# Altium PCB DS141-1.1-A循环式二氧化碳.PcbDoc
Units mm, origin at the board's own origin, x right, y up, seen from the top; angles counter-clockwise.
Board outline 42.01 x 116 mm, 2 copper layers (Top Layer, Bottom Layer), stack 1.581 mm thick; 71 components, 63 nets, 260 pads, 80 vias.
Unrouted connection lines stored in the file: 6.
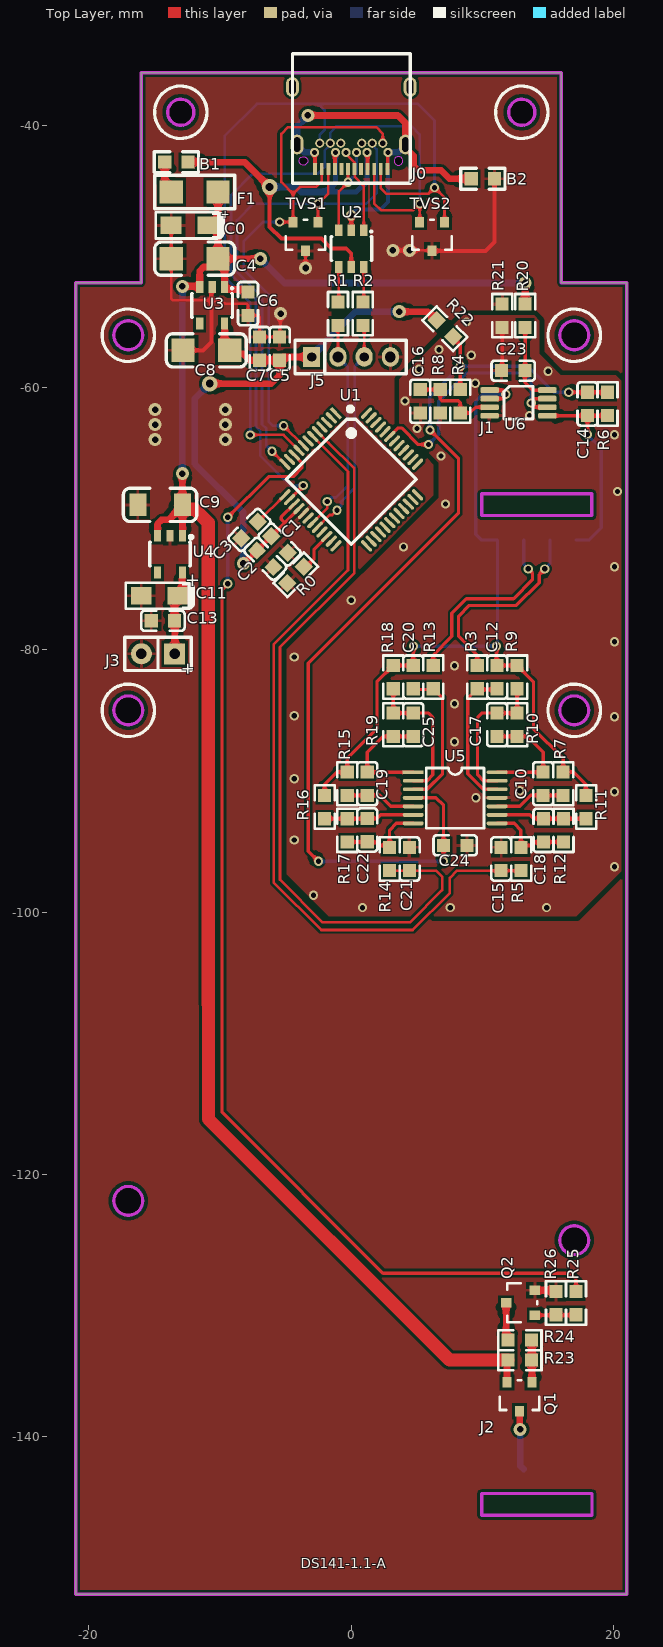
[diagram p0: Top Layer view]
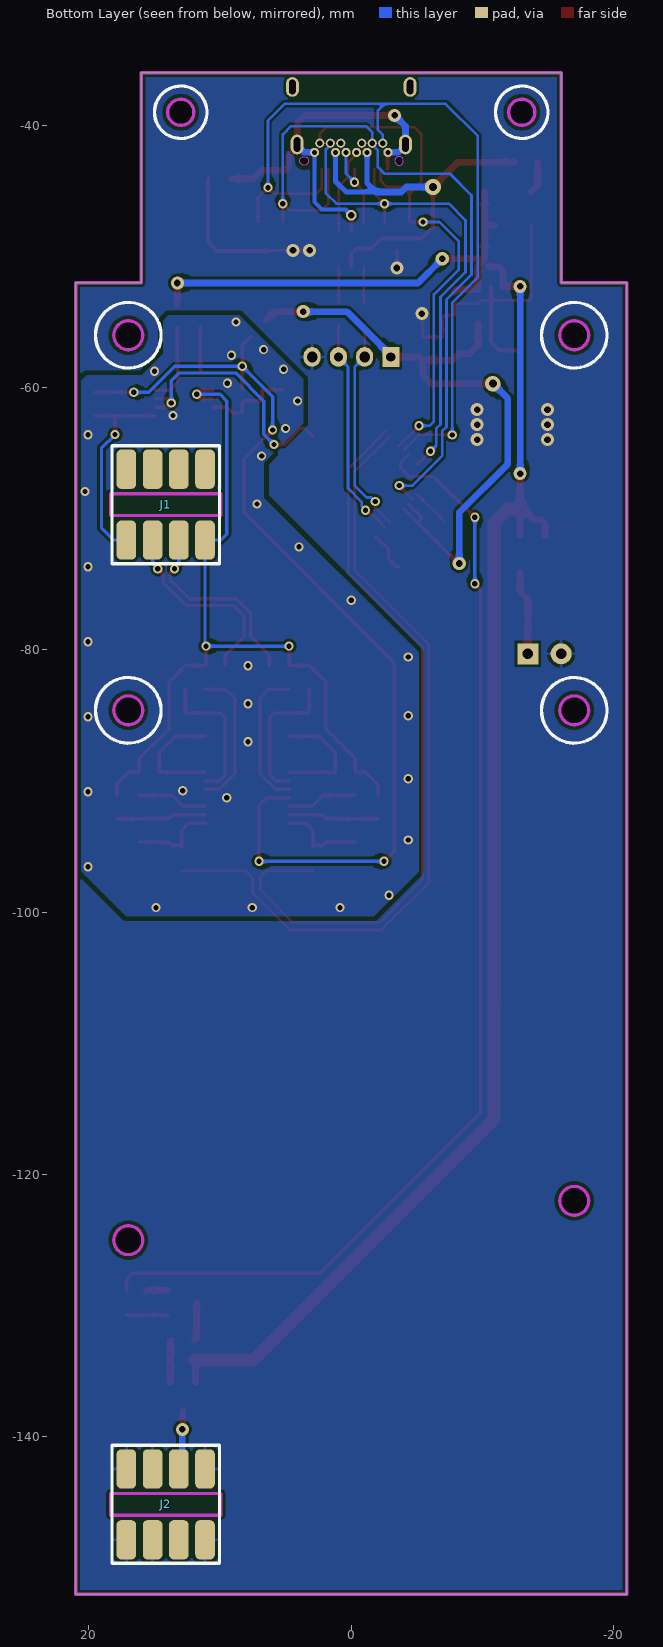
[diagram p1: Bottom Layer view, seen from below]
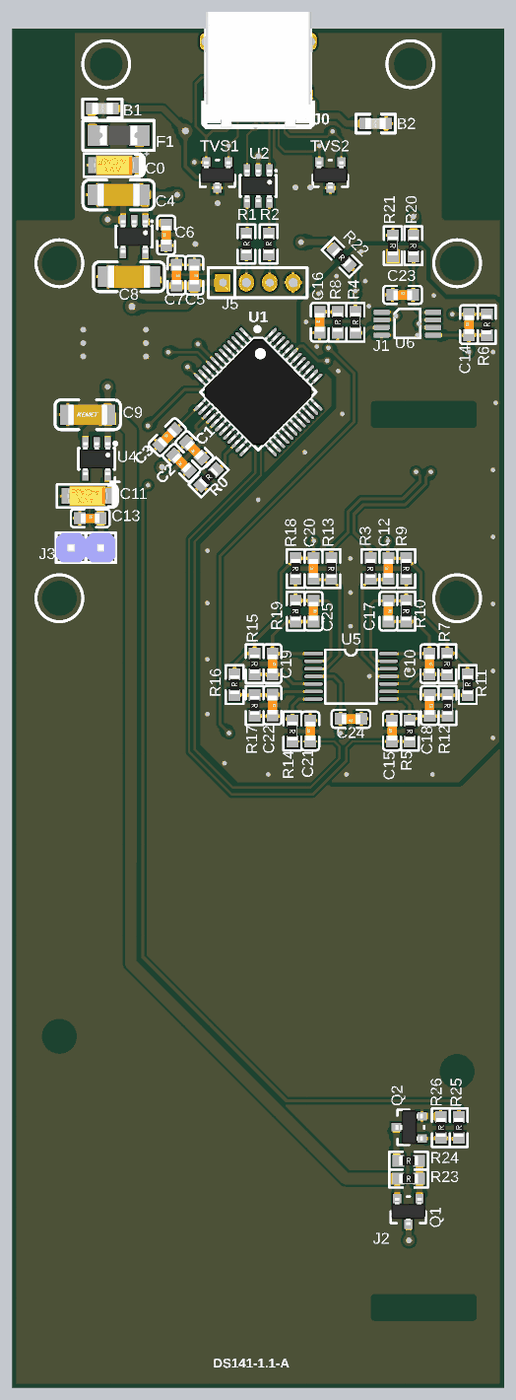
[diagram p2: 3D render of the assembled board from above, using the file's embedded part models]

## Layer stack, top to bottom
Top Solder: solder mask 0.0102, Solder Resist, Dk 3.5
Top Layer: signal copper 0.0356
Dielectric 1: dielectric 1.51, FR-4, Dk 4.8
Bottom Layer: signal copper 0.0356
Bottom Solder: solder mask 0.0102, Solder Resist, Dk 3.5

## Board outline
-21.006,-151.994 -21.006,-51.994 -16.002,-51.994 -16.002,-35.992 16.002,-35.992 16.002,-51.994 20.996,-51.994 20.996,-151.994 21.006,-151.994
cut-out: 15.9,-125 ccw(c17,-125) 17,-126.1 ccw(c17,-125) 18.1,-125 ccw(c17,-125) 17,-123.9 ccw(c17,-125)
cut-out: -18.1,-122 ccw(c-17,-122) -17,-123.1 ccw(c-17,-122) -15.9,-122 ccw(c-17,-122) -17,-120.9 ccw(c-17,-122)
cut-out: 15.9,-84.6 ccw(c17,-84.6) 17,-85.7 ccw(c17,-84.6) 18.1,-84.6 ccw(c17,-84.6) 17,-83.5 ccw(c17,-84.6)
cut-out: 12,-39 ccw(c13,-39) 13,-40 ccw(c13,-39) 14,-39 ccw(c13,-39) 13,-38 ccw(c13,-39)
cut-out: -13,-40 ccw(c-13,-39) -12,-39 ccw(c-13,-39) -13,-38 ccw(c-13,-39) -14,-39 ccw(c-13,-39)
cut-out: -18.1,-84.6 ccw(c-17,-84.6) -17,-85.7 ccw(c-17,-84.6) -15.9,-84.6 ccw(c-17,-84.6) -17,-83.5 ccw(c-17,-84.6)
cut-out: 18.1,-56 ccw(c17,-56) 17,-54.9 ccw(c17,-56) 15.9,-56 ccw(c17,-56) 17,-57.1 ccw(c17,-56)
cut-out: -18.1,-56 cw(c-17,-56) -17,-54.9 cw(c-17,-56) -15.9,-56 cw(c-17,-56) -17,-57.1 cw(c-17,-56)

## Design rules (kind name [scope] priority, off if disabled: settings)
Clearance [All] p1: gap=0.2 ignorepadtopadclearanceinfootprint=TRUE except(0.381: Fill-Fill Fill-Poly Fill-Region Poly-Poly Poly-Region Region-Region)
MinimumSolderMaskSliver [All] p1: minsoldermaskwidth=0.102
PolygonConnect GND [All] p1: thpad.connectstyle=Relief thpad.reliefconductorwidth=0.254 thpad.reliefentries=4 thpad.polygonreliefangle="90 Angle" thpad.airgapwidth=0.254 smdpad.connectstyle=Relief smdpad.reliefconductorwidth=0.254 smdpad.reliefentries=4 smdpad.polygonreliefangle="90 Angle" smdpad.airgapwidth=0.254 via.connectstyle=Direct via.reliefconductorwidth=0.254 via.reliefentries=4 via.polygonreliefangle="90 Angle" via.airgapwidth=0.254
PolygonConnect VSS [InNet('VSS') vs InNet('VSS')] p2: thpad.connectstyle=Relief thpad.reliefconductorwidth=0.508 thpad.reliefentries=4 thpad.polygonreliefangle="90 Angle" thpad.airgapwidth=0.254 smdpad.connectstyle=Relief smdpad.reliefconductorwidth=0.508 smdpad.reliefentries=4 smdpad.polygonreliefangle="90 Angle" smdpad.airgapwidth=0.254 via.connectstyle=Direct via.reliefconductorwidth=0.508 via.reliefentries=4 via.polygonreliefangle="90 Angle" via.airgapwidth=0.254
RoutingVias [All] p1: holewidth=0.6 width=1 viastyle="Through Hole" minholewidth=0.4 minwidth=0.8 maxholewidth=1 maxwidth=2
SilkToSilkClearance [All] p1: silktosilkclearance=0.025
SilkToSolderMaskClearance [IsPad] p1: minsilkscreentomaskgap=0.025 clearancetoexposedcopper=TRUE
SolderMaskExpansion [All] p1: expansion=0.102 istentingtop=FALSE
Width [All] p1: maxlimit=1 minlimit=0.2 preferedwidth=0.2
27 further rules are at their usual default settings.

## Components (designator, comment, footprint, x,y, rotation, side; value= is the part's Value field where it differs from the comment)
B1 "CBM160808U102" 0603Bead -13.335,-42.799 r180 top
B2 "CBM160808U102" 0603Bead 10.033,-44.069 r0 top
C0 "AVX_10uF/16V ±10％(C106)" AVX_3216-18(1206)_SMD -12.319,-47.625 r180 top value=10uF
C1 "SMDCAP00013" 0603CAP -5.467,-71.953 r135 top value=100nF
C2 "SMDCAP00012" 0603CAP -6.559,-73.045 r135 top value=4.7uF
C3 "SMDCAP00015" 0603CAP -7.764,-70.846 r45 top value=1uF
C4 "MLCC 10uF 50V ±20％ 1206" 1206CAP#1 -11.938,-50.165 r0 top value=10uF
C5 "SMDCAP00013" 0603CAP -5.461,-57.022 r270 top value=100nF
C6 "SMDCAP00015" 0603CAP -7.874,-53.593 r90 top value=1uF
C7 "SMDCAP00015" 0603CAP -6.985,-57.022 r270 top value=1uF
C8 "MLCC 10uF 50V ±20％ 1206" 1206CAP#1 -11.049,-57.149 r0 top value=10uF
C9 "MLCC 10uF 50V ±20％ 1206" 1206CAP#2 -14.578,-68.934 r0 top value=10uF
C10 "SMDCAP00015" 0603CAP 14.63,-90.195 r270 top value=1uF
C11 "AVX_10uF/16V ±10％(C106)" AVX_3216-18(1206)_SMD -14.603,-75.868 r180 top value=10uF
C12 "SMDCAP00013" 0603CAP 11.125,-82.066 r90 top value=100nF
C13 "SMDCAP00015" 0603CAP -14.362,-77.773 r0 top value=1uF
C14 "SMDCAP00013" 0603CAP 18.009,-61.239 r90 top value=100nF
C15 "SMDCAP00013" 0603CAP 11.43,-95.936 r90 top value=100nF
C16 "SMDCAP00013" 0603CAP 5.258,-61.036 r90 top value=100nF
C17 "SMDCAP00013" 0603CAP 11.125,-85.699 r270 top value=100nF
C18 "SMDCAP00013" 0603CAP 14.656,-93.751 r270 top value=100nF
C19 "SMDCAP00015" 0603CAP 1.219,-90.195 r270 top value=1uF
C20 "SMDCAP00013" 0603CAP 4.724,-82.066 r90 top value=100nF
C21 "SMDCAP00013" 0603CAP 4.445,-95.936 r90 top value=100nF
C22 "SMDCAP00013" 0603CAP 1.219,-93.726 r270 top value=100nF
C23 "SMDCAP00013" 0603CAP 12.344,-58.699 r0 top value=100nF
C24 "SMDCAP00013" 0603CAP 7.925,-94.894 r180 top value=100nF
C25 "SMDCAP00013" 0603CAP 4.724,-85.699 r270 top value=100nF
F1 "SMD1206-050C-16V" 1206FUSE -11.938,-45.085 r0 top value="16V /0.5A"
J0 "USB_Type_C_24P" USB_TYPE_C_24P_Receptacle 0,-40.2 r180 top locked
J1 "SL000000034" CO2_connecet_4p 14.148,-68.918 r180 top value=GZG361
J2 "SL000000029" CO2_connecet_4p 14.148,-145.143 r0 top value=红外线灯泡
J3 "SL000000042" SIP2 -14.732,-80.289 r180 top value=Motor
J5 "DIP4单排直针  间距2mm 针长11mm 铜" H4 -3.016,-57.658 r0 top value=4P
Q1 "SMDPMOS00001" SOT23 12.828,-136.949 r180 top value=IRLML6402TRPBF
Q2 "SMDNPN00001" SOT23 12.904,-129.769 r90 top value=SS8050
R0 "Chip 0R 1/16W ±1％ 0603" 0603RES -4.242,-74.27 r45 top value=0R
R1 "Chip 22R 1/16W ±1％ 0603" 0603RES -1.016,-54.356 r90 top value=22R
R2 "Chip 22R 1/16W ±1％ 0603" 0603RES 0.889,-54.356 r90 top value=22R
R3 "SMDRES00047" 0603RES 9.601,-82.066 r270 top value=4.7K
R4 "SMDRES00071" 0603RES 8.306,-61.036 r90 top value=100K
R5 "SMDRES00015" 0603RES 12.954,-95.936 r270 top value=100R
R6 "Chip 500K 1/10W ±1% 0603" 0603RES 19.533,-61.239 r90 top value=500K
R7 "SMDRES00085" 0603RES 16.154,-90.195 r270 top value=1M
R8 "SMDRES00071" 0603RES 6.782,-61.036 r90 top value=100K
R9 "Chip 5K 1/10W ±0.1％ 0603" 0603RES 12.649,-82.066 r270 top value="5K ±0.1%"
R10 "Chip 500K 1/10W ±0.1% 0603" 0603RES 12.649,-85.699 r270 top value="500K ±0.1%"
R11 "Chip 2K 1/10W ±0.1％ 0603" 0603RES 17.907,-91.973 r90 top value="2K ±0.1%"
R12 "Chip 50K 1/10W ±0.1％ 0603" 0603RES 16.18,-93.751 r270 top value="50K ±0.1%"
R13 "SMDRES00047" 0603RES 6.248,-82.066 r270 top value=4.7K
R14 "SMDRES00015" 0603RES 2.921,-95.936 r270 top value=100R
R15 "SMDRES00085" 0603RES -0.305,-90.195 r270 top value=1M
R16 "Chip 2K 1/10W ±0.1％ 0603" 0603RES -2.032,-91.973 r90 top value="2K ±0.1%"
R17 "Chip 50K 1/10W ±0.1％ 0603" 0603RES -0.305,-93.751 r270 top value="50K ±0.1%"
R18 "Chip 5K 1/10W ±0.1％ 0603" 0603RES 3.2,-82.066 r270 top value="5K ±0.1%"
R19 "Chip 500K 1/10W ±0.1% 0603" 0603RES 3.2,-85.699 r270 top value="500K ±0.1%"
R20 "Chip 0R 1/16W ±1％ 0603" 0603RES 13.259,-54.508 r270 top value=0R
R21 "Chip 0R 1/16W ±1％ 0603" 0603RES 11.506,-54.508 r270 top value=0R
R22 "Chip 0R 1/16W ±1％ 0603" 0603RES 7.137,-55.499 r315 top value=0R
R23 "SMDRES00056" 0603RES 12.853,-134.147 r0 top value=10K
R24 "SMDRES00034" 0603RES 12.853,-132.623 r0 top value=1K
R25 "SMDRES00090" 0603RES 17.136,-129.794 r90 top value=3.3K
R26 "SMDRES00071" 0603RES 15.612,-129.794 r90 top value=100K
TVS1 "MMBZ9V1A" SOT23 -3.49,-48.471 r180 top
TVS2 "MMBZ9V1A" SOT23 6.157,-48.471 r180 top
U1 "STC32G12K128_35I LQFP48" LQFP-48 0,-67 r315 top locked value=STC32G12K128
U2 "82400102" SOT23-6 0,-49.4 r180 top
U3 "ME6211C33M5G-N" SOT23-5 -10.607,-53.717 r180 top
U4 "ME6211C33M5G-N" SOT23-5 -13.816,-72.693 r180 top
U5 "TP5594-TR  TSSOP-14" TSSOP14 7.925,-91.694 r0 top value=TP5594
U6 "LMV358IDGKR  VSSOP-8" VSSOP-8-H-1.1 12.751,-61.163 r0 top value=LMV358

## Footprints (in the part's own frame and the unit in brackets; to place one, negate y for a bottom-side part, rotate by r counter-clockwise, add the part's x,y. Pads: shape width x height; smd on the part's side, far side on the other; paste and mask are expansions set on the pad)
0603Bead [mm]
  rect 1x1 smd: 1(-0.889,0) 2(0.889,0)
  silkscreen extent -1.69,-0.8 1.69,0.8, body extent -0.9,-0.48 0.85,0.48, height 0.95
0603CAP [mm]
  rect 1x1 smd: 1(-0.889,0) 2(0.89,0)
  silkscreen extent -1.65,-0.76 1.65,0.76, body extent -0.8,-0.4 0.8,0.4, height 0.3
0603RES [mm]
  rect 1x1 smd: 1(-0.889,0) 2(0.889,0)
  silkscreen extent -1.65,-0.76 1.65,0.76, body extent -0.8,-0.41 0.8,0.41, height 0.51
1206CAP#1 [mil]
  rect 70x70 smd: 1(-70,0) 2(70,0)
  silkscreen extent -120,-50 120,50, body extent -73,-38 73,38, height 47
1206CAP#2 [mil]
  rect 51.18x66.93 smd: 1(-66.93,0) 2(66.93,0)
  silkscreen extent -110,-50 110,50, body extent -67,-35 67,35, height 71
1206FUSE [mil]
  rect 70x70 smd: 1(-70,0) 2(70,0)
  silkscreen extent -120,-50 120,50, body extent -63,-33 63,33, height 57
AVX_3216-18(1206)_SMD [mm]
  rect 1.6x1.35 smd: 1(-1.41,0) 2(1.41,0)
  silkscreen extent -2.6,-1 2.6,1, body extent -1.7,-0.84 1.7,0.84, height 1.71
CO2_connecet_4p [mm]
  rrect50% 1.5x3 smd far side: 1(-3,2.7) 1(-3,-2.7) 2(-1,2.7) 2(-1,-2.7) 3(1,2.7) 3(1,-2.7) 4(3,2.7) 4(3,-2.7)
  Keep-Out Layer lines w0.254: 4.2,0.825 -4.2,0.825 -4.2,-0.825 4.2,-0.825 4.2,0.825
H4 [mm]
  rect 1.3x1.5 hole 0.7: 1(0,0)
  oval 1.3x1.5 hole 0.813: 2(2,0) 4(6,0)
  oval 1.3x1.5 hole 0.7: 3(4,0)
  silkscreen extent -1.27,-1.27 7.2,1.27
LQFP-48 [mm]
  rect 1.1x0.27 smd mask+0.08: 1(-4.4,2.75)
  oval 1.1x0.27 smd mask+0.08: 2(-4.4,2.25) 3(-4.4,1.75) 4(-4.4,1.25) 5(-4.4,0.75) 6(-4.4,0.25) 7(-4.4,-0.25) 8(-4.4,-0.75) 9(-4.4,-1.25) 10(-4.4,-1.75) 11(-4.4,-2.25) 12(-4.4,-2.75) 25(4.4,-2.75) 26(4.4,-2.25) 27(4.4,-1.75) 28(4.4,-1.25) 29(4.4,-0.75) 30(4.4,-0.25) 31(4.4,0.25) 32(4.4,0.75) 33(4.4,1.25) 34(4.4,1.75) 35(4.4,2.25) 36(4.4,2.75)
  oval 0.27x1.1 smd mask+0.08: 13(-2.75,-4.4) 14(-2.25,-4.4) 15(-1.75,-4.4) 16(-1.25,-4.4) 17(-0.75,-4.4) 18(-0.25,-4.4) 19(0.25,-4.4) 20(0.75,-4.4) 21(1.25,-4.4) 22(1.75,-4.4) 23(2.25,-4.4) 24(2.75,-4.4) 37(2.75,4.4) 38(2.25,4.4) 39(1.75,4.4) 40(1.25,4.4) 41(0.75,4.4) 42(0.25,4.4) 43(-0.25,4.4) 44(-0.75,4.4) 45(-1.25,4.4) 46(-1.75,4.4) 47(-2.25,4.4) 48(-2.75,4.4)
  silkscreen extent -3.95,-3.5 3.5,3.85, body extent -4.51,-4.5 4.5,4.5, height 1.54
SIP2 [mm]
  rect 1.6x1.6 hole 0.813: 1(-1.27,0)
  round 1.6 hole 0.813: 2(1.27,0)
  silkscreen extent -2.54,-1.27 2.54,1.27, body extent -2.54,-1.27 2.54,1.27, height 8.64
SOT23 [mm]
  rect 0.7x0.8 smd: 1(-0.95,-1.1) 2(0.95,-1.1) 3(0,1.1)
  silkscreen extent -1.5,-1.27 1.5,1, body extent -1.46,-1.17 1.46,1.17, height 1
SOT23-5 [mm] "SOT-23/SC-74A; 5 Leads; Body 3.1 x 3 mm, inc. leads (LxW max)"
  rect 0.55x0.9 smd: 1(-0.95,-1.4) 2(0,-1.4) 3(0.95,-1.4) 4(0.95,1.4) 5(-0.95,1.4)
  silkscreen extent -1.59,-1.36 1.55,0.9, body extent -1.45,-1.4 1.45,1.4, height 1.45
SOT23-6 [mm] "SOT-23/SC-74A; 5 Leads; Body 3.1 x 3 mm, inc. leads (LxW max)"
  rect 0.55x0.9 smd: 1(-0.95,-1.4) 2(0,-1.4) 3(0.95,-1.4) 4(0.95,1.4) 5(0,1.4) 6(-0.95,1.4)
  silkscreen extent -1.59,-1.36 1.55,0.9, body extent -1.45,-1.4 1.45,1.4, height 1.45
TSSOP14 [mm]
  rect 1.6x0.3 smd: 1(-3.2,2.375)
  oval 1.6x0.3 smd: 2(-3.2,1.725) 3(-3.2,1.075) 4(-3.2,0.425) 5(-3.2,-0.225) 6(-3.2,-0.875) 7(-3.2,-1.525) 8(3.2,-1.525) 9(3.2,-0.875) 10(3.2,-0.225) 11(3.2,0.425) 12(3.2,1.075) 13(3.2,1.725) 14(3.2,2.375)
  silkscreen extent -2.2,-1.9 2.2,2.7
USB_TYPE_C_24P_Receptacle [mm]
  oval 1x1.5 hole 0.5 slot 1.1 at 90.5 deg: 0(-4.49,-3.13) 0(-4.13,1.26) 0(4.13,1.26) 0(4.49,-3.13)
  rect 0.3x0.9 smd mask+0.1: A1(-2.75,3.13) A2(-2.25,3.13) A3(-1.75,3.13) A4(-1.25,3.13) A5(-0.75,3.13) A6(-0.25,3.13) A7(0.25,3.13) A8(0.75,3.13) A9(1.25,3.13) A10(1.75,3.13) A11(2.25,3.13) A12(2.75,3.13)
  round 0.7 hole 0.4: B1(2.8,1.86) B2(2.4,1.16) B3(1.6,1.16) B4(1.2,1.86) B5(0.8,1.16) B6(0.4,1.86) B7(-0.4,1.86) B8(-0.8,1.16) B9(-1.2,1.86) B10(-1.6,1.16) B11(-2.4,1.16) B12(-2.8,1.86)
  Keep-Out Layer board cut-out: 3.98,2.51 3.955,2.384 3.883,2.277 3.776,2.205 3.65,2.18 3.65,2.18 3.524,2.205 3.417,2.277 3.345,2.384 3.32,2.51 3.32,2.51 3.345,2.636 3.417,2.743 3.524,2.815 3.65,2.84 3.65,2.84 3.776,2.815 3.883,2.743 3.955,2.636 3.98,2.51
  Keep-Out Layer board cut-out: -3.93,2.51 -3.905,2.384 -3.833,2.277 -3.726,2.205 -3.6,2.18 -3.6,2.18 -3.474,2.205 -3.367,2.277 -3.295,2.384 -3.27,2.51 -3.27,2.51 -3.295,2.636 -3.367,2.743 -3.474,2.815 -3.6,2.84 -3.6,2.84 -3.726,2.815 -3.833,2.743 -3.905,2.636 -3.93,2.51
  silkscreen extent -4.48,-5.66 4.48,4.21, body extent -4.87,-5.66 4.88,4.21, height 3.36
VSSOP-8-H-1.1 [mm]
  rrect50% 1.4x0.45 smd mask+0.05: 1(-2.2,0.975) 2(-2.2,0.325) 3(-2.2,-0.325) 4(-2.2,-0.975) 5(2.2,-0.975) 6(2.2,-0.325) 7(2.2,0.325) 8(2.2,0.975)
  silkscreen extent -1.1,-1.22 1.1,1.28

## Part data
B1 B2: library part "Chip Ferrite Bead 0606", "贴片磁珠"
C0 C11: "钽电容"
C1 C5 C12 C14 C15 C16 C17 C18 C20 C21 C22 C23 C24 C25: library part "MLCC 100nF 50V ±10％ 0603", "贴片电容"
C2: library part "MLCC 4.7uF 50V ±10％ 0603", "贴片电容"
C3 C6 C7 C10 C13 C19: library part "MLCC 1uF 50V ±10％ 0603", "贴片电容"
C4 C8 C9: "贴片电容"
F1: "贴片自恢复保险丝 16V /0.5A"
J1: library part "XH2.54mm-4AW 弯针座", "4P弯针座"
J2: library part "XH2.54mm-4A 直针座", "4P直针座"
J3: library part "DIP2 单排直针 1*40P 间距2.54mm 针长11mm 铜", "单排直针"
J5: "单排直针"
Q1: library part "IRLML6402TRPBF SOT-23 IR", "贴片P-MOS管"
Q2: library part "SS8050 Y1 SOT-23", "贴片三极管"
R0 R1 R2 R20 R21 R22: "贴片电阻"
R3 R13: library part "Chip 4.7K 1/10W ±1％ 0603", "贴片电阻"
R4 R8 R26: library part "Chip 100K 1/16W ±1％ 0603", "贴片电阻"
R5 R14: library part "Chip 100R 1/16W ±1％ 0603", "贴片电阻"
R7 R15: library part "Chip 1M 1/16W ±1％ 0603", "贴片电阻"
R23: library part "Chip 10K 1/16W ±1％ 0603", "贴片电阻"
R24: library part "Chip 1K 1/16W ±1％ 0603", "贴片电阻"
R25: library part "Chip 3.3K 1/16W ±1％ 0603", "贴片电阻"
TVS1 TVS2: library part TVS, "瞬态抑制二极管"
U1: "单片机芯片"
U2: "瞬态抑制二极管(TVS)"
U3 U4: "稳压芯片"
U6: "双路、5.5V、1MHz、4mV 失调电压、RRO 运算放大器"

## Via types
v1: diameter 0.7, hole 0.4, Top Layer to Bottom Layer, tented both sides, 59 vias
v2: diameter 1, hole 0.5, Top Layer to Bottom Layer, tented both sides, 18 vias
v3: diameter 1.2, hole 0.6, Top Layer to Bottom Layer, tented both sides, 2 vias
v4: diameter 0.8, hole 0.5, Top Layer to Bottom Layer, tented both sides, 1 vias

## Nets (pads, with @x,y where several pads share a name; then routed paths per layer and width w, separated by ;. In a path a pad name is that pad's centre, name@x,y a point inside that pad or via, vN(x,y) a via of type N, cw(c..) or ccw(c..) an arc to the next point about the centre after c; other vN are vias at no path point)
+: 
-: 
ADC0: C21.1 R14.2 U1.5 | length 57.6
  Top Layer w0.2: U1.5 -1.736,-64.204 0.229,-66.167 0.229,-74.117 -5.436,-79.781 -5.436,-97.511 -2.184,-100.762 4.48,-100.762 6.934,-98.308 6.934,-97.282 6.477,-96.825 C21.1 R14.2
ADC1: C15.1 R5.2 U1.6 | length 60.3
  Top Layer w0.2: U1.6 -0.254,-66.392 -0.254,-73.917 -5.918,-79.582 -5.918,-97.711 -2.283,-101.346 4.683,-101.346 7.518,-98.511 7.518,-97.384 8.077,-96.825 C15.1 R5.2@12.929,-96.825
ADC8: U1.43 U6.6 U6.7 | length 20.2
  Top Layer w0.254: U1.43 3.578,-63.068 3.835,-63.068 5.099,-64.332 v1(5.883,-64.332) ; U6.6 13.87,-61.488 13.721,-61.339 v1(13.721,-61.173) 13.721,-61.006 13.889,-60.838 U6.7
  Bottom Layer w0.254: v1(5.883,-64.332) 6.671,-63.544 6.671,-61.02 8.814,-58.877 13.132,-58.877 13.721,-59.466 v1(13.721,-61.173)
AGND: C15.2 C16.1 C21.2 C23.1 C24.1 R8.1 R21.2 U5.11 U6.4 | length 3.3
  Top Layer w0.254: C23.1 11.506,-58.649 R21.2
  other v1: 0.851,-99.644 7.544,-99.644 14.897,-99.644 -2.871,-98.694 20.066,-96.52 -4.343,-94.488 9.5,-91.262 20.066,-90.802 12.852,-90.729 -4.343,-89.814 7.874,-86.995 20.066,-85.084 -4.343,-85.014 7.874,-84.099 7.874,-81.204 -4.343,-80.543 20.066,-79.366 0,-76.2 20.066,-73.648 3.988,-72.136 7.188,-68.859 20.295,-67.92 6.833,-65.202 20.066,-63.586 5.004,-63.119 13.589,-62.128 4.089,-61.011 9.449,-59.665 15.011,-58.75 5.156,-58.598 9.144,-57.531 6.68,-57.099 8.788,-54.991
D+_I/O1: J0.A6 J0.B6 U2.1 | length 6.5
  Top Layer w0.2: J0.B6 -0.4,-42.179 0.25,-42.829 J0.A6 0.266,-43.346 0.266,-43.93 0.95,-44.613 U2.1
D-_I/O2: J0.A7 J0.B7 U2.3 | length 7
  Top Layer w0.2: -0.95,-47.498 -0.95,-45.032 v1(-0.25,-44.332) J0.A7
  Bottom Layer w0.2: v1(-0.25,-44.332) 0.4,-43.682 J0.B7
DAC_OUT: R25.2 U1.10 | length 87.2
  Top Layer w0.254: v1(-9.423,-74.955) -9.855,-75.387 -9.855,-115.24 2.413,-127.508 16.662,-127.508 17.136,-127.982 R25.2 R25.2@17.171,-128.87 ; v1@-9.411,-69.888 -6.299,-66.777 -4.42,-66.777 -3.759,-66.116 -3.759,-65.716 U1.10
  Bottom Layer w0.254: v1(-9.423,-74.955) v1(-9.423,-69.875)
Dis1_red_EN: U1.35
Dis2_green_EN: U1.34
Dis3_blue_EN: U1.36
GND: B2.2 C0.2 C1.1 C2.1 C3.1 C4.1 C5.1 C6.1 C7.1 C8.1 C9.1 C11.2 C13.1 J2.1 J2.3 J2.4 J3.2 J5.4 Q2.2 R0.1 R21.1 R26.2 TVS1.3 TVS2.3 U1.17 U3.2 U4.2 | length 40.5
  Top Layer w0.2: C0.2 -13.729,-50.152 C4.1 -13.716,-53.223 -13.599,-53.34 -10.668,-53.34 -9.906,-53.34 -9.711,-53.535 ccw(c-9.569,-53.394) -9.569,-53.594 -8.074,-53.594 cw(c-8.074,-53.794) -7.874,-53.794 C6.1 -7.185,-54.482 cw(c-7.185,-54.682) -6.985,-54.682 C7.1 C5.1 -5.444,-55.733 cw(c-5.244,-55.733) -5.444,-55.726 v2(-5.385,-54.356) ; TVS1.3 -3.49,-50.866 v2(-3.48,-50.876) ; v2(3.175,-49.53) v2(4.445,-49.53) 6.116,-49.53 TVS2.3
  Top Layer w0.3: C8.1@-12.7,-57.15 -11.303,-57.15 -10.668,-56.515 -10.668,-53.34 U3.2@-10.668,-52.317 ; TVS2.3 10.246,-49.571 10.922,-48.895 B2.2 B2.2@10.905,-44.052
  Top Layer w0.508: Q2.2 15.526,-128.819 R26.2
  other v2: -14.961,-63.957 -9.6,-63.957 -14.961,-62.814 -9.6,-62.814 -14.961,-61.671 -9.6,-61.671
I2C1_SCL: U1.38
I2C1_SDA: U1.37
KEY_HOME: U1.21
NetB1_2: B1.2 F1.1 | length 2.5
  Top Layer w0.508: B1.2 -14.224,-44.577 F1.1
NetC10_1: C10.1 C17.2 R10.2 U5.14 | length 9
  Top Layer w0.254: U5.14 14.618,-89.319 C10.1 14.63,-87.808 13.41,-86.588 11.126,-86.588 C17.2
NetC10_2: C10.2 R7.2 U5.10 | length 5.4
  Top Layer w0.254: U5.10 12.856,-91.919 13.69,-91.085 C10.2 14.631,-91.084 R7.2
NetC12_1: C12.1 R3.2 U5.12 | length 11.1
  Top Layer w0.254: U5.12 10.076,-90.619 8.89,-89.433 8.89,-83.667 R3.2 9.653,-83.007 11.049,-83.007 11.101,-82.955 C12.1
NetC16_2: C16.2 R4.1 R8.2 U6.3 | length 7.1
  Top Layer w0.254: C16.2 R8.2 R8.2 6.782,-60.858 6.909,-60.985 8.153,-60.985 8.306,-61.138 R4.1 9.042,-61.925 9.479,-61.488 U6.3
NetC17_1: C17.1 R9.2 R10.1 U5.13 | length 11.1
  Top Layer w0.254: U5.13 10.068,-89.969 9.627,-89.528 9.627,-85.141 9.958,-84.81 C17.1 R10.1 R9.2
NetC18_1: C18.1 R11.1 R12.1 U5.9 | length 6.9
  Top Layer w0.254: U5.9 13.6,-92.569 13.868,-92.837 14.63,-92.837 C18.1 16.154,-92.862 R11.1@17.882,-92.862
NetC18_2: C18.2 R5.1 R12.2 U5.8 | length 6.7
  Top Layer w0.254: U5.8 12.422,-93.219 12.929,-93.726 12.929,-95.047 13.077,-94.899 13.661,-94.899 13.898,-94.661 14.585,-94.661 14.63,-94.616 14.655,-94.64 R12.2@16.154,-94.64
NetC19_1: C19.1 C25.2 R19.2 U5.1 | length 9
  Top Layer w0.254: U5.1 1.232,-89.319 C19.1 1.219,-87.808 2.439,-86.588 C25.2 C25.2
NetC19_2: C19.2 R15.2 U5.5 | length 5.4
  Top Layer w0.254: R15.2 1.218,-91.084 C19.2 2.16,-91.085 2.994,-91.919 U5.5
NetC20_1: C20.1 R13.2 U5.3 | length 11.1
  Top Layer w0.254: U5.3 5.774,-90.619 6.96,-89.433 6.96,-83.667 R13.2 6.197,-83.007 4.801,-83.007 4.749,-82.955 C20.1
NetC22_1: C22.1 R16.1 R17.1 U5.6 | length 6.9
  Top Layer w0.254: R16.1 R17.1 1.194,-92.862 C22.1 1.981,-92.837 2.249,-92.569 U5.6
NetC22_2: C22.2 R14.1 R17.2 U5.7 | length 6.7
  Top Layer w0.254: R17.2 1.195,-94.64 C22.2 1.265,-94.661 1.951,-94.661 2.189,-94.899 2.773,-94.899 R14.1 2.921,-93.726 3.428,-93.219 U5.7
NetC25_1: C25.1 R18.2 R19.1 U5.2 | length 11.1
  Top Layer w0.254: R18.2 R19.1 C25.1 5.892,-84.81 6.223,-85.141 6.223,-89.528 5.782,-89.969 U5.2
NetJ2_2: J2.2 Q1.3 | length 4.5
  Top Layer w0.508: Q1.3 12.853,-138.074 12.853,-139.396 v2(12.878,-139.421)
  Bottom Layer w0.508: v2(12.878,-139.421) 12.878,-142.173 J2.2@13.148,-142.443
NetQ1_1: Q1.1 R23.2 R24.2 | length 3.2
  Top Layer w0.508: R24.2 13.778,-132.659 Q1.1
NetQ2_1: Q2.1 R25.1 R26.1 | length 3.1
  Top Layer w0.254: Q2.1 17.1,-130.719 R25.1
NetQ2_3: Q2.3 R24.1 | length 2.9
  Top Layer w0.508: Q2.3 11.804,-132.463 R24.1
NTC: C14.1 J1.1 R6.1 U6.5 | length 15.8
  Top Layer w0.254: U6.5 C14.1@18.009,-62.138 ; v1(18.009,-63.576) C14.1@18.009,-62.138 ; C14.1 C14.1@18.009,-62.138 ; R6.1 19.523,-62.138 C14.1@18.009,-62.138
  Bottom Layer w0.254: J1.1@17.148,-71.618 18.095,-71.618 19.05,-70.663 19.05,-64.618 v1(18.009,-63.576)
P3.0/D-/RxD: J5.2 R1.1 U1.19 | length 16.7
  Top Layer w0.2: U1.19 -1.829,-69.182 v1(-1.829,-68.682) ; J5.2 R1.1
  Bottom Layer w0.2: v1(-1.829,-68.682) -1.524,-68.377 -1.168,-68.377 -0.279,-67.488 -0.279,-58.395 J5.2
P3.1/D+/TxD: J5.3 R2.1 U1.20 | length 17
  Top Layer w0.2: U1.20 -1.644,-69.705 -1.455,-69.705 v1(-1.092,-69.342) ; R2.1 0.984,-55.34 J5.3
  Bottom Layer w0.2: v1(-1.092,-69.342) -0.787,-69.037 -0.787,-68.707 0.254,-67.666 0.254,-58.388 J5.3
P3.3: R0.2 U1.22 | length 3.1
  Top Layer w0.254: R0.2 -3.435,-73.641 -2.84,-73.046 -2.84,-72.315 U1.22
PWM: U1.33
REF: J1.3 R13.1 | length 15.1
  Top Layer w0.254: R13.1 6.248,-80.391 7.671,-78.969 7.671,-77.209 8.781,-76.098 12.37,-76.098 13.818,-74.651 13.818,-74.143 v1(13.487,-73.812)
  Bottom Layer w0.254: J1.3@13.148,-71.618 13.148,-73.473 v1(13.487,-73.812)
REF_1V65: C12.2 C20.2 J1.4 R7.1 R9.1 R11.2 R15.1 R16.2 R18.1 U6.1 U6.2 | length 63
  Top Layer w0.254: R16.2 -2.032,-90.221 -1.118,-89.306 R15.1 -0.305,-88.265 1.956,-86.004 1.956,-82.422 R18.1 C20.2 C20.2 4.724,-79.731 v1(4.75,-79.705) ; U6.2@10.195,-60.936 U6.2@10.195,-60.838 ; U6.2 11.613,-60.838 11.781,-60.671 v1(11.781,-60.504) 11.781,-60.337 11.632,-60.188 U6.1 ; v1(11.074,-79.705) 11.074,-81.126 C12.2 11.126,-81.177 R9.1 13.894,-82.422 13.894,-86.004 16.154,-88.265 R7.1 16.967,-89.306 17.882,-90.221 R11.2@17.882,-91.084
  Bottom Layer w0.254: v1@4.835,-79.747 5.08,-79.747 5.122,-79.705 v1(11.074,-79.705) 11.148,-79.632 11.148,-71.618 9.941,-71.618 9.494,-71.171 9.494,-62.79 9.494,-61.016 10.007,-60.504 v1(11.781,-60.504)
SIG: J1.2 R3.1 | length 15.1
  Top Layer w0.254: R3.1 9.601,-80.391 8.179,-78.969 8.179,-77.419 8.992,-76.606 12.58,-76.606 14.326,-74.861 14.326,-74.244 v1(14.757,-73.812)
  Bottom Layer w0.254: v1(14.757,-73.812) 15.148,-73.422 J1.2@15.148,-71.618
SPI1/SPI2_CS: J0.A3 J0.B3 TVS2.2 U1.14 | length 57.7
  Top Layer w0.2: U1.14 -3.658,-67.476 v1(-3.658,-67.462) ; J0.A3 1.75,-45.946 2.286,-46.482 4.713,-46.482 v1(5.221,-45.974) 5.221,-47.357 TVS2.2
  Bottom Layer w0.2: v1(-3.658,-67.462) -4.674,-67.462 -6.934,-65.202 -6.934,-63.316 -7.264,-62.985 -7.264,-53.283 -9.169,-51.378 -9.169,-45.339 -7.518,-43.688 -2.54,-43.688 -2.032,-43.18 -2.032,-41.927 J0.B3@-1.6,-41.495 ; J0.B3 -1.6,-40.551 -1.11,-40.061 4.605,-40.061 5.221,-40.677 v1(5.221,-45.974)
SPI1_MISO: J0.A11 J0.B11 TVS1.2 U1.8 | length 41.8
  Top Layer w0.2: v1(-5.461,-47.371) TVS1.2 -4.44,-45.217 ; v1(-5.156,-62.904) U1.8 ; J0.A11 -2.25,-44.249 -2.694,-44.693 -3.916,-44.693 -4.44,-45.217 ; J0.B11 2.4,-40.627 1.905,-40.132 -4.826,-40.132 -5.334,-40.64 -5.334,-44.323 -4.44,-45.217
  Bottom Layer w0.2: v1(-5.461,-47.371) -6.731,-47.371 -8.204,-48.844 -8.204,-50.978 -6.299,-52.883 -6.299,-62.586 -5.98,-62.904 v1(-5.156,-62.904)
SPI1_MOSI: J0.A10 J0.B10 TVS1.1 U1.12 | length 39.9
  Top Layer w0.2: v1(-6.045,-64.846) -5.058,-65.833 U1.12 ; TVS1.1 v1(-2.54,-45.974) -1.75,-45.184 J0.A10
  Bottom Layer w0.2: v1(-6.045,-64.846) -6.477,-64.414 -6.477,-63.126 -6.807,-62.796 -6.807,-53.093 -8.712,-51.188 -8.712,-47.244 -7.442,-45.974 v1(-2.54,-45.974) 1.143,-45.974 1.938,-45.179 1.938,-41.833 1.6,-41.495 J0.B10
SPI1_SCK: J0.A2 J0.B2 TVS2.1 U1.9 | length 62.7
  Top Layer w0.2: v1(-7.696,-63.602) -5.166,-63.602 U1.9 ; J0.A2 2.25,-44.795 2.667,-45.212 5.884,-45.212 v1(6.35,-44.746) 7.107,-45.503 TVS2.1
  Bottom Layer w0.2: v1(-7.696,-63.602) -7.696,-53.533 -9.652,-51.577 -9.652,-40.806 -7.2,-38.354 -2.54,-38.354 ; J0.B2 -2.4,-40.707 -2.032,-40.339 -2.032,-38.862 -2.54,-38.354 ; v1(6.35,-44.746) 6.35,-39.624 5.08,-38.354 -2.54,-38.354
SPI2_MISO: U1.29
SPI2_MOSI: U1.18
SPI2_SCK: U1.31
UCAP: C3.2 U1.13 | length 2.9
  Top Layer w0.2: C3.2 -7.106,-70.217 U1.13
USART2_RXD: U1.27
USART2_RXD2: U1.42
USART2_TXD: U1.28
USART2_TXD2: U1.7
USB_D+: R2.2 U2.6 | length 2.7
  Top Layer w0.2: R2.2 0.95,-53.406 U2.6
USB_D-: R1.2 U2.4 | length 2.7
  Top Layer w0.2: R1.2 -0.95,-53.401 U2.4
VBUS: B1.1 J0.A4 J0.A9 J0.B4 J0.B9 U2.5 | length 34.1
  Top Layer w0.254: J0.A9 J0.A9@-1.227,-43.307 ; J0.B4@-1.227,-42.087 J0.B4 ; J0.B9 J0.B9@1.227,-42.087
  Top Layer w0.3: v3(-6.223,-44.704) -6.223,-47.752 -5.334,-48.641 -2.286,-48.641 -1.524,-49.403 -0.381,-49.403 0,-49.784 U2.5 ; J0.A9 J0.B4@-1.25,-42.11 ; J0.A4 J0.B9@1.25,-42.11
  Top Layer w0.508: B1.1 -8.128,-42.799 v3(-6.223,-44.704)
  Bottom Layer w0.4: J0.B4 -1.2,-44.38 -1.905,-45.085 0.381,-45.085 1.2,-44.266 J0.B9
  Bottom Layer w0.508: v3(-6.223,-44.704) -4.191,-44.704 -3.81,-45.085 -1.905,-45.085
VCC_3V3_ANA: C14.2 C24.2 R4.2 R6.2 R22.2 U5.4 | length 77.4
  Top Layer w0.254: v1(-2.498,-96.114) -3.277,-95.335 -3.277,-81.001 8.179,-69.545 8.179,-65.405 v1(5.994,-63.221) ; U5.4 6.458,-91.269 7.035,-91.845 C24.2 7.036,-94.895 v1(7.036,-96.114) ; R22.2@7.644,-56.081 8.306,-56.743 v1(8.306,-58.369) R4.2 ; v1(16.586,-60.35) R6.2
  Bottom Layer w0.254: v1@-2.489,-96.114 v1(7.036,-96.114) ; v1(5.994,-63.221) 5.994,-60.681 v1(8.306,-58.369) 13.462,-58.369 15.443,-60.35 v1(16.586,-60.35)
VCC_3V3_MCU: C1.2 C2.2 C5.2 C7.2 C8.2 J5.1 R22.1 U1.15 U1.16 U3.5 | length 50.6
  Top Layer w0.254: v2(-8.23,-73.406) -8.174,-73.406 -5.024,-70.256 ; U1.15 -5.334,-69.859 -5.334,-70.028 -5.105,-70.256 -5.024,-70.256 ; U1.16 -5.024,-70.256
  Top Layer w0.3: C5.2 C5.2@-5.207,-57.658
  Top Layer w0.508: v3(-10.795,-59.69) -6.096,-59.69 -5.461,-59.055 C5.2 C7.2 -7.747,-57.912 -8.255,-57.404 -9.016,-57.404 C8.2 -9.657,-56.763 U3.5 ; C5.2@-5.207,-57.658 J5.1 ; v2(3.658,-54.204) 5.842,-54.204 R22.1
  Bottom Layer w0.508: v3(-10.795,-59.69) -11.938,-60.833 -11.938,-65.811 -8.23,-69.52 v2(-8.23,-73.406) ; J5.1 -3.016,-57.558 0.338,-54.204 v2(3.658,-54.204)
VCC_3V3_MOTOR: C11.1 C13.2 J3.1 U4.5 | length 6.8
  Top Layer w0.508: J3.1@-13.447,-80.592 -13.447,-77.797 C13.2 -13.472,-76.146 C11.1 -12.866,-75.541 U4.5
VCC_5V: C0.1 C4.2 C6.2 C9.2 F1.2 Q1.2 R20.1 R23.1 U3.1 U3.3 U4.1 U4.3 | length 142.3
  Top Layer w0.508: U4.3 -14.766,-70.374 -14.468,-70.077 -13.914,-70.077 -13.367,-69.53 -13.274,-69.53 C9.2@-12.878,-69.134 ; v2(-12.878,-66.548) C9.2 -12.866,-68.946 U4.1 ; v2(-12.878,-52.273) -11.601,-52.273 U3.3 -11.557,-51.098 -11.259,-50.8 -10.571,-50.8 C4.2@-10.444,-50.673 ; C0.1 C0.1@-10.16,-47.625 ; F1.2 C0.1@-10.16,-47.625 ; U3.1 -9.657,-50.668 C4.2 ; U3.1@-9.636,-52.513 -8.064,-52.513 C6.2 ; v2(-6.934,-50.165) C4.2 ; Q1.2 11.878,-134.234 R23.1 ; R20.1 v2(13.259,-52.019) ; C4.2 C0.1@-10.16,-47.625
  Top Layer w1: -10.897,-107.036 -10.897,-115.758 7.493,-134.147 R23.1
  Top Layer w1.016: C9.2 -12.878,-69.134 -12.736,-69.276 -11.928,-69.276 -10.897,-70.307 -10.897,-107.036
  Bottom Layer w0.508: v2(-12.878,-66.548) v2(-12.878,-52.273) ; v2(-6.934,-50.165) -5.08,-52.019 v2(13.259,-52.019)
VCC_5V_ANA: C23.2 R20.2 U6.8 | length 6.2
  Top Layer w0.254: R20.2 13.259,-58.675 C23.2 13.234,-59.572 13.851,-60.188 U6.8
VSS: B2.1 J0.A1 J0.A12 J0.B1 J0.B12 U2.2 | length 32.5
  Top Layer w0.254: J0.B1 -2.773,-42.087 -2.773,-43.307 J0.A12 ; J0.A1 2.773,-43.307 2.773,-42.087 J0.B12
  Top Layer w0.3: U2.2 v4(0,-46.857)
  Top Layer w0.508: v2@-3.434,-39.243 3.556,-39.243 4.13,-39.817 4.13,-41.697 4.764,-42.331 4.764,-43.075 5.124,-43.434 6.858,-43.434 7.493,-44.069 B2.1
  Bottom Layer w0.3: v4(0,-46.857) 0.433,-46.424 2.217,-46.424 2.8,-45.841 J0.B12
  Bottom Layer w0.508: -4.13,-41.46 -4.13,-40.071 v2(-3.302,-39.243) ; -4.123,-41.515 -3.578,-42.06 J0.B1 ; J0.B12 3.578,-42.06 4.123,-41.515
pads on no net: J0.0 J0.A5 J0.A8 J0.B5 J0.B8 U1.1 U1.2 U1.3 U1.4 U1.11 U1.23 U1.24 U1.25 U1.26 U1.30 U1.32 U1.39 U1.40 U1.41 U1.44 U1.45 U1.46 U1.47 U1.48 U3.4 U4.4

## Polygon pours and split planes (outlines as drawn)
GND on Top Layer "GND_L01_P006" (solid, remove dead copper, pour order 6): 20.996,-151.994 20.996,-51.994 16.012,-51.994 16.002,-51.984 16.002,-35.992 -16.002,-35.992 -16.002,-51.991 -16.004,-51.994 -20.985,-51.994 -20.996,-52.004 -20.996,-87.196 -21.011,-151.994
AGND on Top Layer "NONET_L02_P-001" (solid, remove dead copper, pour order 2): 13.945,-54.483 14.351,-54.889 14.351,-57.429 15.977,-59.055 20.168,-59.055 20.599,-59.487 20.599,-96.876 17.17,-100.305 -1.727,-100.305 -4.928,-97.104 -4.928,-79.959 6.655,-68.377 6.655,-65.71 3.658,-62.713 3.658,-59.36 8.534,-54.483
GND on Bottom Layer "GND_L02_P010" (solid, remove dead copper, pour order 10): 20.996,-151.994 20.996,-51.994 16.012,-51.994 16.002,-51.984 16.002,-35.992 -16.002,-35.992 -16.002,-51.991 -16.004,-51.994 -20.985,-51.994 -20.996,-52.004 -20.996,-87.196 -21.011,-151.994
AGND on Bottom Layer "NONET_L02_P-001" (solid, remove dead copper, pour order 9): 13.945,-54.483 14.351,-54.889 14.351,-57.429 15.977,-59.055 20.168,-59.055 20.599,-59.487 20.599,-96.876 17.17,-100.305 -1.727,-100.305 -5.131,-96.901 -5.131,-80.162 6.655,-68.377 6.655,-65.71 3.658,-62.713 3.658,-59.36 8.534,-54.483

## Keep-outs
Keep-Out Layer:
  circle w0.254: c13,-39 r1
  circle w0.254: c-13,-39 r1
  circle w0.254: c17,-125 r1.1
  circle w0.254: c-17,-122 r1.1
  circle w0.254: c17,-84.6 r1.1
  circle w0.254: c-17,-84.6 r1.1
  circle w0.254: c17,-56 r1.1
  circle w0.254: c-17,-56 r1.1
  lines w0.254: 20.996,-151.994 20.996,-51.994 ; 21.006,-151.994 -21.006,-151.994 -21.006,-124.993 ; 21.006,-51.994 16.002,-51.994 16.002,-35.992 -16.002,-35.992 -16.002,-51.994 -21.006,-51.994 ; -21.006,-124.993 -21.006,-51.994 ; -21.006,-124.993 -21.006,-51.994

## Other copper
Top Layer:
  pour cut-out: -1.915,-48.327 -1.539,-48.704 1.479,-48.704 1.479,-55.999 -1.479,-55.999 -1.479,-48.943 -1.95,-48.472
  pour cut-out: -0.824,-44.14 -0.824,-48.049 -1.479,-48.704 -1.899,-48.284 -5.186,-48.284 -5.378,-48.092 -4.911,-47.625 -3.937,-47.625 -3.937,-45.147 -2.824,-44.034 -0.894,-44.034

## Silkscreen, mask and mechanical layers (free items; w line width, h text height)
Top Overlay:
  circle w0.254: c13,-39 r2
  circle w0.254: c-13,-39 r2
  circle w0.254: c17,-84.6 r2
  circle w0.254: c-17,-84.6 r2
  circle w0.254: c17,-56 r2
  circle w0.254: c-17,-56 r2
  text "+" at -13.163,-80.95 h1.52 r270
  text "DS141-1.1-A" at -3.861,-150.292 h1.27
Bottom Overlay:
  circle w0.254: c13,-39 r2
  circle w0.254: c-13,-39 r2
  circle w0.254: c17,-84.6 r2.5
  circle w0.254: c-17,-84.6 r2.5
  circle w0.254: c17,-56 r2.5
  circle w0.254: c-17,-56 r2.5
Mechanical 1:
  circle w0.254: c-17,-56 r1.1
  circle w0.254: c17,-56 r1.1
  circle w0.254: c-17,-84.6 r1.1
  circle w0.254: c17,-84.6 r1.1
  circle w0.254: c-17,-122 r1.1
  circle w0.254: c17,-125 r1.1
  circle w0.254: c-13,-39 r1
  circle w0.254: c13,-39 r1
  lines w0.254: 20.996,-151.994 20.996,-51.994 ; 21.006,-151.994 -21.006,-151.994 -21.006,-124.993 ; 21.006,-51.994 16.002,-51.994 16.002,-35.992 -16.002,-35.992 -16.002,-51.994 -21.006,-51.994 ; -21.006,-124.993 -21.006,-51.994 ; -21.006,-124.993 -21.006,-51.994

## Text inside footprints (layer, text, board x,y; h text height)
C0: Top Overlay "+" at -9.271,-46.355 h1 r180
C11: Top Overlay "+" at -11.503,-74.268 h1 r180